# Altium PCB PCB_机器人_2021-05-25.pcbdoc
Units mil, origin at the board's own origin, x right, y up, seen from the top; angles counter-clockwise.
Board outline 3372.2 x 4356.46 mil, 2 copper layers (Top Layer, Bottom Layer); 14 components, 49 nets, 97 pads, 1 vias.
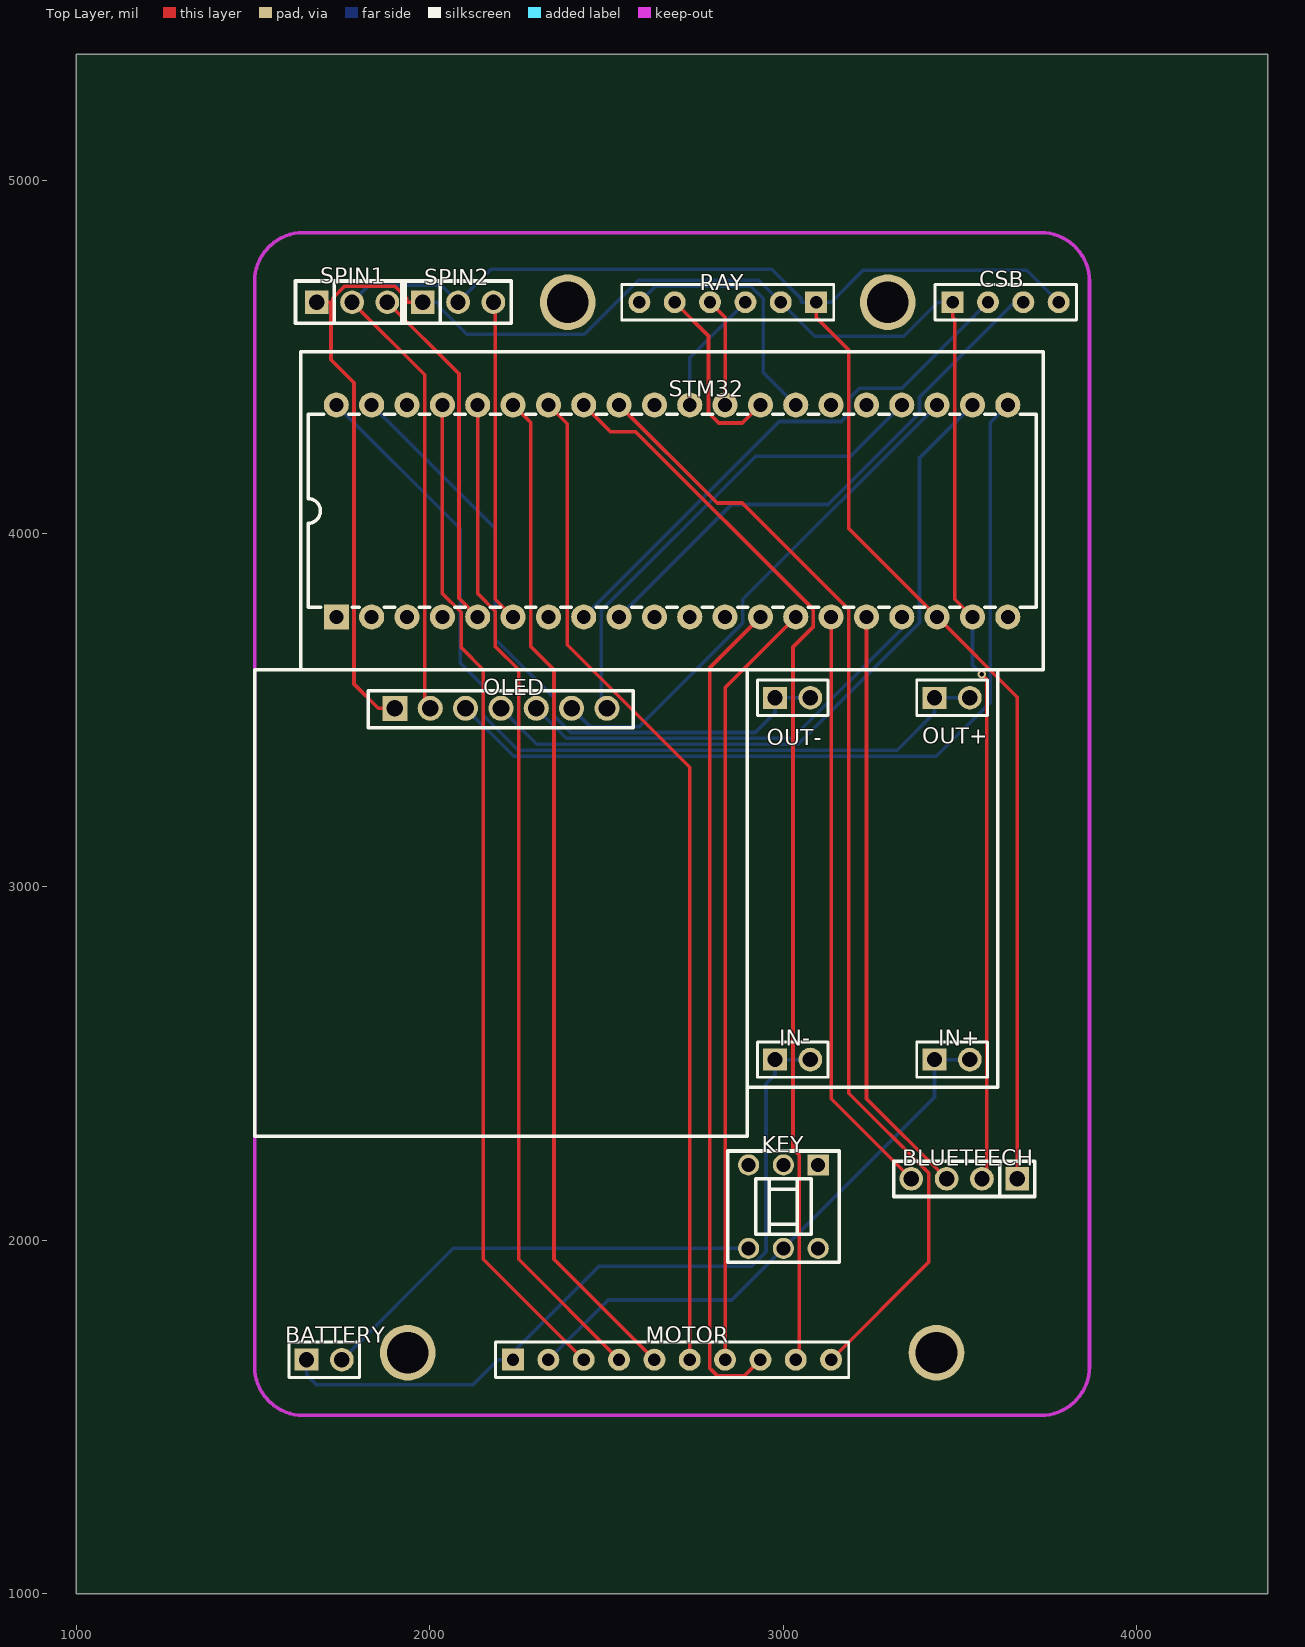
[diagram p0: Top Layer view]
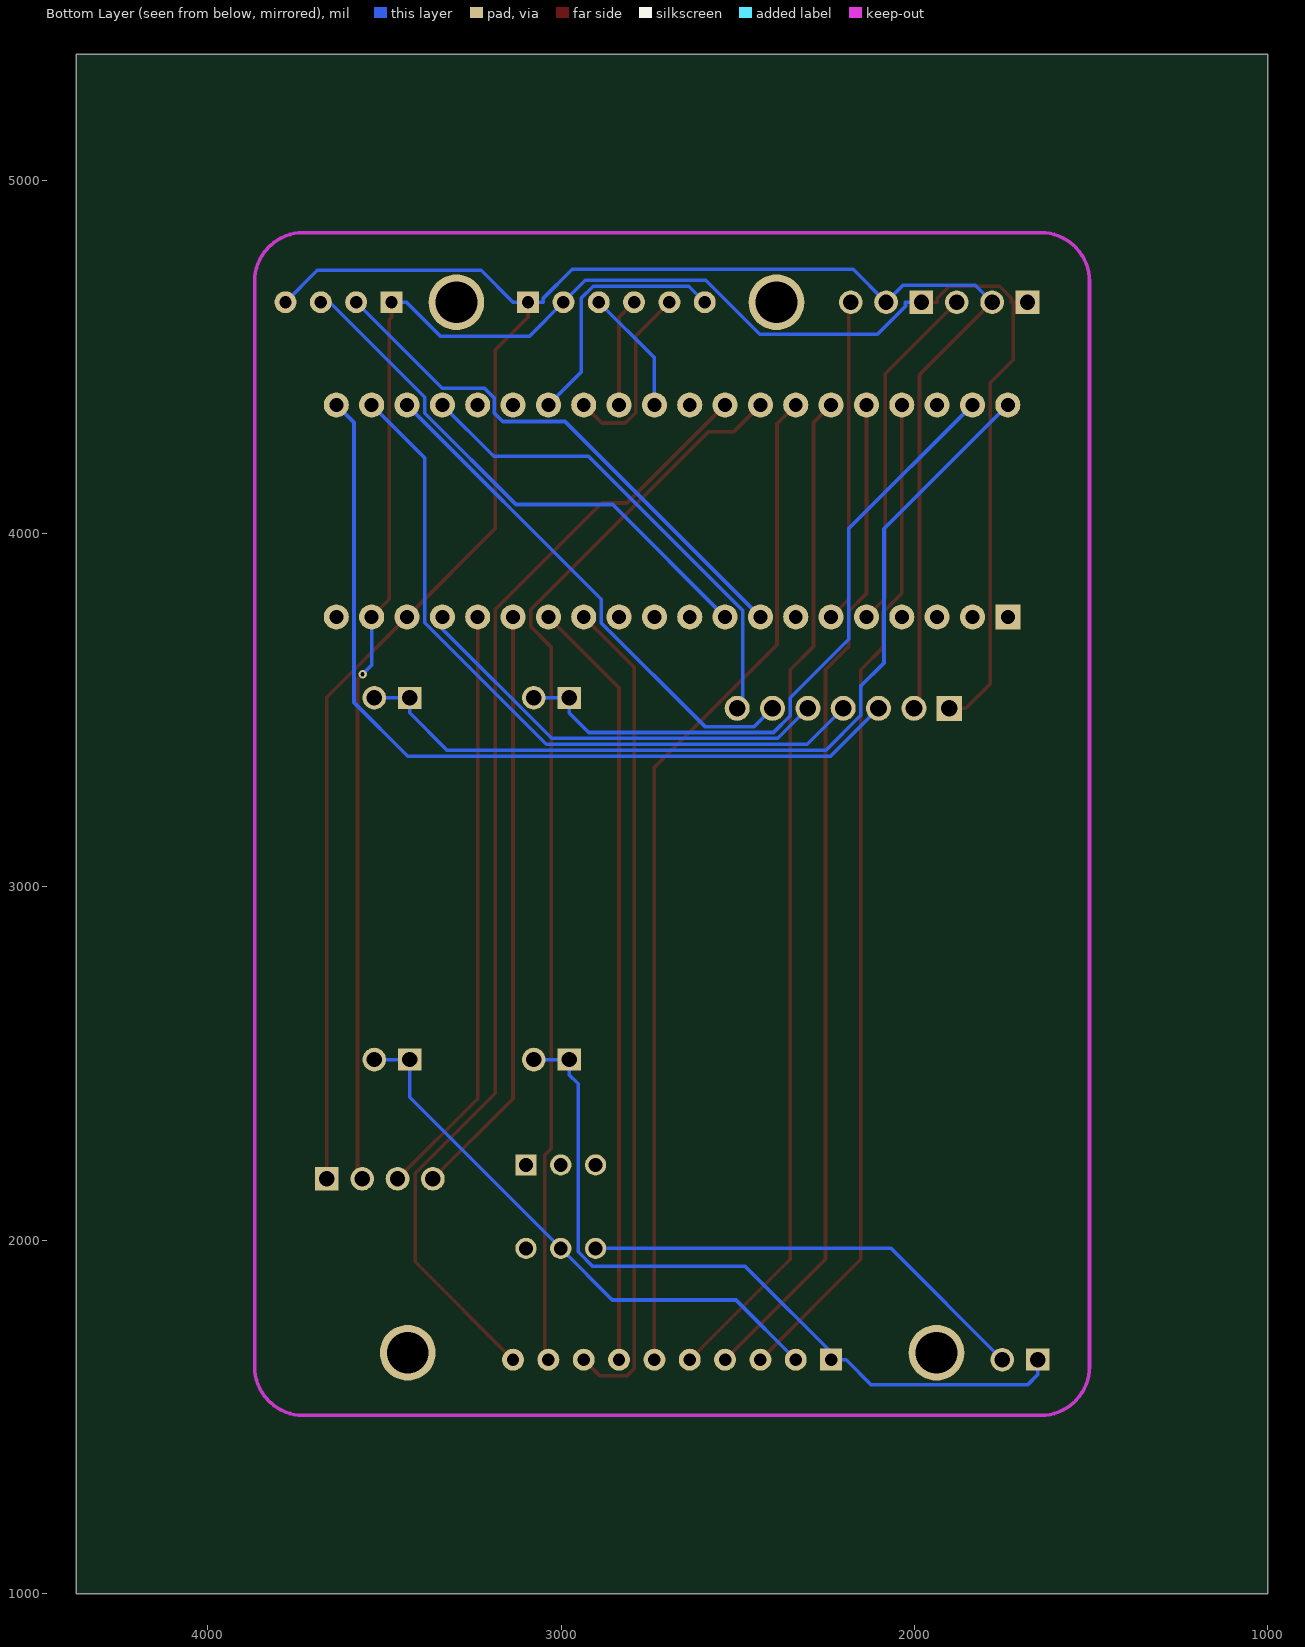
[diagram p1: Bottom Layer view, seen from below]

## Layer stack, top to bottom
Top Layer: signal copper (thickness not stored)
Dielectric: dielectric 12.6, FR-4, Dk 4.8
Bottom Layer: signal copper (thickness not stored)

## Board outline
4372.2,1000 1000,1000 1000,5356.46 4372.2,5356.46

## Components (designator, comment, footprint, x,y, rotation, side; value= is the part's Value field where it differs from the comment)
BATTERY "12V电池" HDR-M-2.54_1X2 1701.85,1662.48 r0 top
BLUETEECH "蓝牙" DIP-1X4P2.54 3512.87,2174.29 r180 top
CSB "超声波" HDR-F-2.54_1X4 3630,4654.61 r0 top
IN+ "IN+" HDR-M-2.54_1X2 3478.62,2511.69 r0 top
IN- "IN-" HDR-M-2.54_1X2 3027.44,2511.69 r0 top
KEY "XKB8080-Z" SW-TH_6P-L8.0-W8.0-P2.50 3001.06,2095.55 r180 top
MOTOR "电机驱动" HDR-M-2.54_1X10 2686.1,1662.48 r0 top
OLED "OLED" OLED 2201.85,3515.63 r0 top
OUT+ "OUT+" HDR-M-2.54_1X2 3478.62,3535.32 r0 top
OUT- "OUT-" HDR-M-2.54_1X2 3027.44,3535.32 r0 top
RAY "红外传感器" HDR-M-2.54_1X6 2843.58,4654.61 r180 top
SPIN1 "舵机夹子" DIP-1X3P-2.54MM-M 1780.59,4654.61 r0 top
SPIN2 "舵机抬升" DIP-1X3P-2.54MM-M 2080.59,4654.61 r0 top
STM32 "STM32F103C8" DIP-40_L52.3-W13.9-P2.54-LS15.2-BL 2686.1,4064.05 r0 top

## Footprints (in the part's own frame and the unit in brackets; to place one, negate y for a bottom-side part, rotate by r counter-clockwise, add the part's x,y. Pads: shape width x height; smd on the part's side, far side on the other; paste and mask are expansions set on the pad)
DIP-1X3P-2.54MM-M [mm]
  rect 1.7x1.7 hole 1.1: 1(-2.54,0)
  round 1.7 hole 1.1: 2(0,0) 3(2.54,0)
  silkscreen extent -4.06,-1.52 3.81,1.52
DIP-1X4P2.54 [mm]
  rect 1.7x1.7 hole 1.1: 1(-3.81,0)
  round 1.7 hole 1.1: 2(-1.27,0) 3(1.27,0) 4(3.81,0)
  silkscreen extent -5.08,-1.27 5.08,1.27
DIP-40_L52.3-W13.9-P2.54-LS15.2-BL [mm]
  rect 1.8x1.8 hole 1: 1(-24.13,-7.62)
  round 1.8 hole 1: 2(-21.59,-7.62) 3(-19.05,-7.62) 4(-16.51,-7.62) 5(-13.97,-7.62) 6(-11.43,-7.62) 7(-8.89,-7.62) 8(-6.35,-7.62) 9(-3.81,-7.62) 10(-1.27,-7.62) 11(1.27,-7.62) 12(3.81,-7.62) 13(6.35,-7.62) 14(8.89,-7.62) 15(11.43,-7.62) 16(13.97,-7.62) 17(16.51,-7.62) 18(19.05,-7.62) 19(21.59,-7.62) 20(24.13,-7.62) 21(24.13,7.62) 22(21.59,7.62) 23(19.05,7.62) 24(16.51,7.62) 25(13.97,7.62) 26(11.43,7.62) 27(8.89,7.62) 28(6.35,7.62) 29(3.81,7.62) 30(1.27,7.62) 31(-1.27,7.62) 32(-3.81,7.62) 33(-6.35,7.62) 34(-8.89,7.62) 35(-11.43,7.62) 36(-13.97,7.62) 37(-16.51,7.62) 38(-19.05,7.62) 39(-21.59,7.62) 40(-24.13,7.62)
  silkscreen extent -26.16,-6.93 26.16,6.93
HDR-F-2.54_1X4 [mil]
  rect 62x62 hole 35: 1(-150,0)
  round 62 hole 35: 2(-50,0) 3(50,0) 4(150,0)
  silkscreen extent -200,-50 200,50
HDR-M-2.54_1X2 [mm]
  rect 1.7x1.575 hole 1.1: 1(-1.27,0)
  round 1.7 hole 1.1: 2(1.27,0)
  silkscreen extent -2.54,-1.27 2.54,1.27
HDR-M-2.54_1X6 [mil]
  rect 62x62 hole 35: 1(-250,0)
  round 62 hole 35: 2(-150,0) 3(-50,0) 4(50,0) 5(150,0) 6(250,0)
  silkscreen extent -300,-50 300,50
HDR-M-2.54_1X10 [mil]
  rect 62x62 hole 35: 1(-450,0)
  round 62 hole 35: 2(-350,0) 3(-250,0) 4(-150,0) 5(-50,0) 6(50,0) 7(150,0) 8(250,0) 9(350,0) 10(450,0)
  silkscreen extent -500,-50 500,50
OLED [mm]
  rect 1.8x1.8 hole 1.2: 1(-7.62,-0.254)
  round 1.8 hole 1.2: 2(-5.08,-0.254) 3(-2.54,-0.254) 4(0,-0.254) 5(2.54,-0.254) 6(5.08,-0.254) 7(7.62,-0.254)
  silkscreen extent -9.53,-1.65 9.53,1.02
SW-TH_6P-L8.0-W8.0-P2.50 [mm]
  rect 1.524x1.524 hole 1: 1(-2.5,-3)
  round 1.524 hole 1: 2(0,-3) 3(2.5,-3) 4(-2.5,3) 5(0,3) 6(2.5,3)
  silkscreen extent -4,-4 4,4

## Free pads (board coordinates)
  round 157.48 hole 118.11 unplated: 1(1938.07,1682.17) 1(2390.83,4654.61) 1(3296.34,4654.61) 1(3434.13,1682.17)

## Via types
v1: diameter 24.02, hole 12.2, Top Layer to Bottom Layer, 1 vias

## Nets (pads, with @x,y where several pads share a name; then routed paths per layer and width w, separated by ;. In a path a pad name is that pad's centre, name@x,y a point inside that pad or via, vN(x,y) a via of type N, cw(c..) or ccw(c..) an arc to the next point about the centre after c; other vN are vias at no path point)
H1_1: BLUETEECH.1 CSB.4 OLED.2 RAY.1 SPIN1.2 SPIN2.2 STM32.18 | length 6154.2
  Top Layer w10.24: SPIN1.2 1986.1,4449.06 1986.1,3521.36 OLED.2@2001.9,3505.66 ; RAY.1 3093.6,4612.06 3186.1,4519.56 3186.1,4014.06 STM32.18 3662.9,3537.26 BLUETEECH.1
  Bottom Layer w10.24: SPIN1.2 1828.5,4702.56 2032.7,4702.56 SPIN2.2 2173.8,4747.76 2968.5,4747.76 3051.1,4665.26 3051.1,4654.56 RAY.1 3136.1,4654.56 3226.4,4744.86 3689.7,4744.86 CSB.4
H1_2: BLUETEECH.2 CSB.1 OLED.1 RAY.2 SPIN1.1 SPIN2.1 STM32.19 | length 5839.7
  Top Layer w10.24: SPIN1.1 1720.9,4654.56 ; OLED.1@1901.9,3505.66 1854.9,3505.66 1786.1,3574.46 1786.1,4426.96 1720.9,4492.16 1720.9,4654.56 ; SPIN2.1 1935.6,4654.56 1935.6,4665.86 1901.9,4699.56 1759.3,4699.56 1725.6,4665.86 1725.6,4654.56 1720.9,4654.56 ; CSB.1 3480,4612.06 3486.1,4605.96 3486.1,3814.06 STM32.19 ; v1(3562,3601.96) 3576.1,3587.86 3576.1,2187.56 BLUETEECH.2
  Bottom Layer w10.24: SPIN2.1 2025.6,4654.56 2025.6,4643.36 2105.1,4563.76 2438.1,4563.76 2591,4716.66 2931.5,4716.66 RAY.2 3089.6,4558.56 3341.5,4558.56 3437.5,4654.56 CSB.1 ; STM32.19 3536.1,3627.86 v1(3562,3601.96)
H1_3: BLUETEECH.3 STM32.16 | length 1683.7
  Top Layer w10.24: STM32.16 3236.1,2401.06 BLUETEECH.3
H1_4: BLUETEECH.4 STM32.15 | length 1683.7
  Top Layer w10.24: STM32.15 3136.1,2401.06 BLUETEECH.4
J1_3: MOTOR.3 STM32.37 | length 2867.3
  Top Layer w10.24: STM32.37 2036.1,3830.46 2089.2,3777.36 2089.2,3677.36 2151.9,3614.66 2151.9,1946.76 MOTOR.3
J1_4: MOTOR.4 STM32.36 | length 2867.3
  Top Layer w10.24: STM32.36 2136.1,3830.46 2186.1,3780.46 2186.1,3680.36 2251.9,3614.66 2251.9,1946.76 MOTOR.4
J1_5: MOTOR.5 STM32.35 | length 2867.3
  Top Layer w10.24: STM32.35 2286.1,4314.06 2286.1,3680.36 2351.9,3614.66 2351.9,1946.76 MOTOR.5
J1_6: MOTOR.6 STM32.34 | length 2867.3
  Top Layer w10.24: STM32.34 2389.2,4310.96 2389.2,3685.66 2736.1,3338.76 MOTOR.6
J1_7: MOTOR.7 STM32.14 | length 2184.4
  Top Layer w10.24: MOTOR.7 2836.1,3564.06 STM32.14
J1_8: MOTOR.8 STM32.13 | length 2356.1
  Top Layer w10.24: MOTOR.8 2890.2,1616.56 2814.5,1616.56 2793.2,1637.86 2793.2,3621.16 STM32.13
J1_9: MOTOR.9 STM32.33 | length 3047.9
  Top Layer w10.24: STM32.33 2512.5,4287.66 2583.7,4287.66 3086.1,3785.26 3086.1,3736.86 3028.4,3679.06 3028.4,2259.26 3046.1,2241.46 3046.1,1672.46 MOTOR.9
J1_10: MOTOR.10 STM32.32 | length 3221.2
  Top Layer w10.24: STM32.32 2813.6,4086.56 2884.8,4086.56 3186.1,3785.26 3186.1,2416.36 3412.9,2189.66 3412.9,1939.26 MOTOR.10
J4_1: OUT-.1 OUT-.2 STM32.39 | length 1904
  Bottom Layer w10.24: STM32.39 2186.1,4014.06 2186.1,3701.26 2351.9,3535.46 2351.9,3484.46 2399.1,3437.16 2921.8,3437.16 2977.5,3492.76 2977.5,3535.36 OUT-.2@3077.4,3535.36
J5_1: OUT+.1 OUT+.2 STM32.40 | length 2554.1
  Bottom Layer w10.24: STM32.40 2086.5,4013.66 2086.5,3633.86 2151.9,3568.56 2151.9,3486.16 2250.8,3387.26 3323.1,3387.26 3428.6,3492.76 3428.6,3535.36 OUT+.2@3528.6,3535.36
J6_1: BATTERY.1 IN-.1 IN-.2 MOTOR.1 | length 2185.9
  Bottom Layer w10.24: BATTERY.1@1651.9,1662.46 1651.9,1619.96 1680.7,1591.16 2122.3,1591.16 2193.6,1662.46 MOTOR.1@2214.9,1662.46 ; MOTOR.1 MOTOR.1@2214.9,1662.46 ; IN-.2 2977.5,2511.66 2977.5,2469.16 2951.9,2443.56 2951.9,1967.96 2910.4,1926.46 2478.9,1926.46 MOTOR.1@2214.9,1662.46
S$15: 
S$17: 
SW1_1: KEY.1
SW1_2: KEY.2
SW1_3: KEY.3
SW1_4: KEY.4
SW1_5: IN+.1 IN+.2 KEY.5 MOTOR.2 | length 1606.8
  Bottom Layer w10.24: MOTOR.2 2505.2,1831.56 2855.2,1831.56 3001.1,1977.46 3428.6,2404.96 IN+.1 IN+.2
SW1_6: BATTERY.2 KEY.6 | length 1281.2
  Bottom Layer w10.24: BATTERY.2@1751.9,1662.46 2066.8,1977.46 KEY.6@2902.6,1977.46
U6_1: STM32.1
U6_2: STM32.2
U6_3: STM32.3
U6_4: STM32.4
U6_5: SPIN1.3 STM32.5 | length 996.4
  Top Layer w10.24: SPIN1.3 2083.1,4452.16 2083.1,3817.06 STM32.5
U6_6: SPIN2.3 STM32.6 | length 913.5
  Top Layer w10.24: SPIN2.3 2186.1,4649.06 2186.1,3814.06 STM32.6
U6_7: STM32.7
U6_8: CSB.2 STM32.8 | length 1537.5
  Bottom Layer w10.24: STM32.8 2989.2,4317.16 3165.1,4317.16 3189.2,4341.16 3189.2,4383.46 3216.7,4410.96 3336.4,4410.96 CSB.2
U6_9: CSB.3 STM32.9 | length 1539.1
  Bottom Layer w10.24: STM32.9 2854.3,4082.26 3127.8,4082.26 3386.1,4340.56 3386.1,4385.56 3655.1,4654.56 CSB.3
U6_10: STM32.10
U6_11: STM32.11
U6_12: STM32.12
U6_20: STM32.20
U6_25: STM32.25
U6_26: STM32.26
U6_27: RAY.6 STM32.27 | length 723
  Bottom Layer w10.24: RAY.6 2639,4700.06 2909.1,4700.06 2943.6,4665.56 2943.6,4456.56 STM32.27
U6_28: RAY.5 STM32.28 | length 532.4
  Top Layer w10.24: RAY.5 2789.2,4559.06 2789.2,4342.06 2818.5,4312.76 2884.8,4312.76 STM32.28
U6_29: RAY.4 STM32.29 | length 308.1
  Top Layer w10.24: RAY.4 2836.1,4612.06 STM32.29
U6_30: RAY.3 STM32.30 | length 355.8
  Bottom Layer w10.24: STM32.30 2736.1,4497.16 RAY.3
U6_31: STM32.31
U6_38: STM32.38
U7_3: OLED.3 STM32.21 | length 2466.5
  Bottom Layer w10.24: OLED.3@2101.9,3505.66 2237.8,3369.66 3433.9,3369.66 3586.1,3521.96 3586.1,4314.06 STM32.21
U7_4: OLED.4 STM32.22 | length 2047.5
  Bottom Layer w10.24: OLED.4@2201.9,3505.66 2303.6,3403.86 3042.5,3403.86 3386.1,3747.46 3386.1,4214.06 STM32.22
U7_5: OLED.5 STM32.17 | length 1231.6
  Bottom Layer w10.24: OLED.5@2301.9,3505.66 2386.9,3420.56 3026.5,3420.56 3336.1,3730.16 STM32.17
U7_6: OLED.6 STM32.23 | length 1472.1
  Bottom Layer w10.24: OLED.6@2401.9,3505.66 2453.6,3453.86 2593.1,3453.86 2886.1,3746.86 2886.1,3814.06 STM32.23
U7_7: OLED.7 STM32.24 | length 1374.3
  Bottom Layer w10.24: OLED.7@2501.9,3505.66 2486.1,3521.36 2486.1,3782.46 2922.5,4218.76 3190.8,4218.76 STM32.24

## Keep-outs
Keep-Out Layer:
  lines w10: 1505,1642.8 ccw(c1642.8,1642.8) 1642.8,1505 ; 1505,4713.66 cw(c1642.8,4713.66) 1642.8,4851.46 ; 3729.41,1505 ccw(c3729.41,1642.8) 3867.2,1642.8 ; 3729.41,4851.46 cw(c3729.41,4713.66) 3867.2,4713.66

## Silkscreen, mask and mechanical layers (free items; w line width, h text height)
Top Overlay:
  lines w10: 2898.7,3614.06 1505,3614.06 1505,2295.16 2898.7,2295.16 2898.7,3614.06 ; 2898.7,3614.06 3607.36,3614.06 3607.36,2432.96 2898.7,2432.96 2898.7,3614.06 ; 1636.1,3614.06 3736.1,3614.06 3736.1,4514.06 1636.1,4514.06 1636.1,3614.06
Document:
  lines w0.1: 2685.1,3177.23 2687.1,3179.23